# EAGLE board riffle-0.96-TwoHole-semi-route (EAGLE 7.3.0)
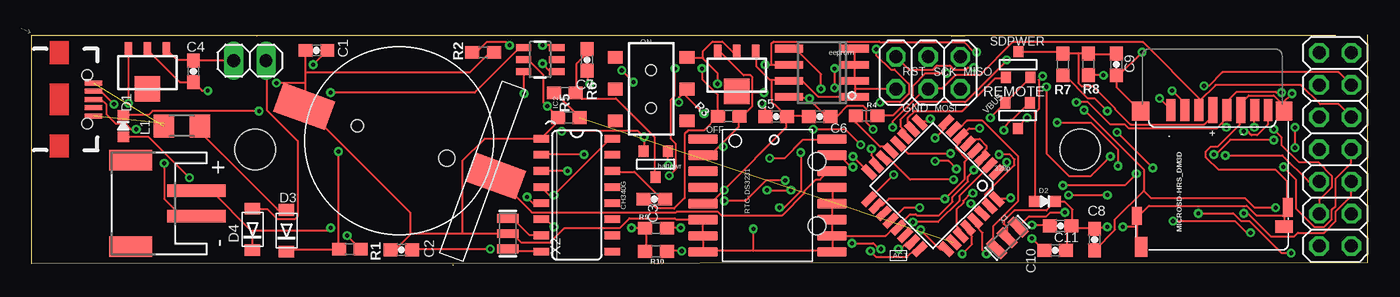
[diagram p0: board, top side]
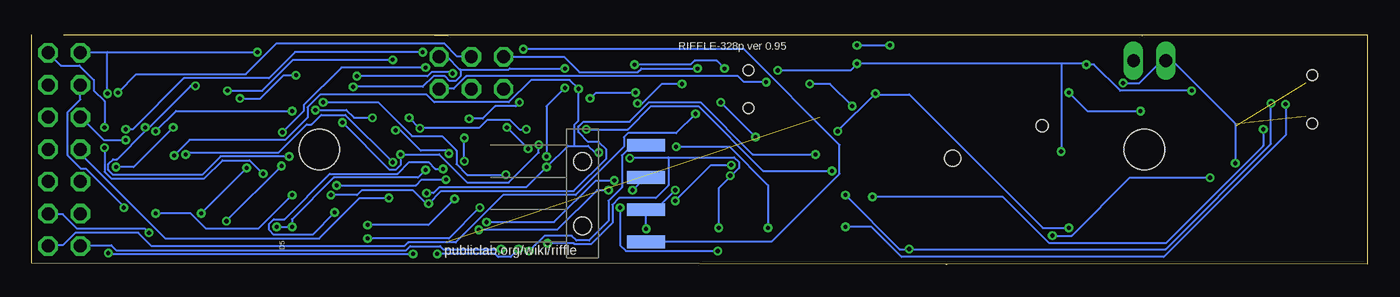
[diagram p1: board, bottom side, seen from below]

Size 105.25 x 18.15 mm. Coordinates in mm from the lower left corner, seen from the top.
Outline: 105.25,18.15 105.25,0.15 0,0.1 0,18.13 17.73,18.1
Outline: 17.73,18.1 102.72,18.11
Outline: 17.75,18.06 17.73,18.1
Outline: 23.37,18.11 23.42,18.11
Outline: 33.15,0 33.25,0
Outline: 72.47,18.06 74.59,18.1
Copper layers (1*16): Top 0.0356mm / dielectric 1.5011mm / Bottom 0.0356mm
Design rules "LaenPCBOrder": minimum track width 6mil, minimum drill 13mil, track to track 6mil, track to pad 6mil, pad to pad 6mil, via to via 6mil, smd to smd 6mil, copper to edge 15mil, drill to drill 6mil, minimum pad ring 7mil, minimum via ring 7mil, stop-mask expansion 3mil, vias tented up to drill 0mil, thermal gap 10mil
Holes 3.2 mm at 82.59,9.1 17.59,9.1

## Footprints (pad centres in the part's own frame; a part is rotated, then mirrored left to right if it is on the bottom)
BATTCON_12MM_SMT = smd 2.4 x 4.3: P$1 0,11.96 | smd 2.4 x 4.2: P$2 0,-4.1 | hole 0.95: 0,7.5 | hole 1.25: 0,0
SOT-23 = smd 0.787 x 0.889: 1 0.025,-1.016; 2 -0.94,1.016; 3 0.991,1.016
0603-CAP = smd 1.1 x 1: 1 -0.85,0; 2 0.85,0
JST-PH-2-SMT-RA = smd 1 x 4.6: 1 1,-3.7; 2 -1,-3.7 | smd 1.6 x 3.4: NC1 -3.4,1.5; NC2 3.4,1.5
0603-LED = smd 0.8 x 0.9: MINUS -0.85,0; PLUS 0.85,0
SOD-123FL = smd 0.91 x 1.22: A 1.637,0; C -1.637,0
TQFP32-08 = smd 1.27 x 0.559: 1 -4.293,2.8; 2 -4.293,2; 3 -4.293,1.2; 4 -4.293,0.4; 5 -4.293,-0.4; 6 -4.293,-1.2; 7 -4.293,-2; 8 -4.293,-2.8; 17 4.293,-2.8; 18 4.293,-2; 19 4.293,-1.2; 20 4.293,-0.4; 21 4.293,0.4; 22 4.293,1.2; 23 4.293,2; 24 4.293,2.8 | smd 0.559 x 1.27: 9 -2.8,-4.293; 10 -2,-4.293; 11 -1.2,-4.293; 12 -0.4,-4.293; 13 0.4,-4.293; 14 1.2,-4.293; 15 2,-4.293; 16 2.8,-4.293; 25 2.8,4.293; 26 2,4.293; 27 1.2,4.293; 28 0.4,4.293; 29 -0.4,4.293; 30 -1.2,4.293; 31 -2,4.293; 32 -2.8,4.293
SOT23-5 = smd 0.55 x 1.2: 1 -0.95,-1.3; 2 0,-1.3; 3 0.95,-1.3; 4 0.95,1.3; 5 -0.95,1.3; 6 0,1.3
SO16 = smd 0.6 x 1.2: 1 -4.445,-2.8; 2 -3.175,-2.8; 3 -1.905,-2.8; 4 -0.635,-2.8; 5 0.635,-2.8; 6 1.905,-2.8; 7 3.175,-2.8; 8 4.445,-2.8; 9 4.445,2.8; 10 3.175,2.8; 11 1.905,2.8; 12 0.635,2.8; 13 -0.635,2.8; 14 -1.905,2.8; 15 -3.175,2.8; 16 -4.445,2.8
SOT89 = smd 0.58 x 1.2: 1 -1.5,-1.8; 2 0,-1.8; 3 1.5,-1.8 | smd 2 x 2: 4 0,1.3
SO-08 = smd 0.6 x 2.2: 1 -1.905,-2.6; 2 -0.635,-2.6; 3 0.635,-2.6; 4 1.905,-2.6; 5 1.905,2.6; 6 0.635,2.6; 7 -0.635,2.6; 8 -1.905,2.6
2X03 = drill 1.016 octagon: 1 -2.54,-1.27; 2 -2.54,1.27; 3 0,-1.27; 4 0,1.27; 5 2.54,-1.27; 6 2.54,1.27
AYZ0202 = smd 1 x 1.15: 1 -2.5,2.825; 2 0,2.825; 3 2.5,2.825; 4 -2.5,-2.825; 5 0,-2.825; 6 2.5,-2.825 | hole 0.85: 1.5,0; -1.5,0
1X02 = drill 1.016 long: 1 -1.27,0; 2 1.27,0
1X04-SMD = smd 1 x 3: 1 -3.81,5; 2 -1.27,5; 3 1.27,5; 4 3.81,5 | hole 1.4: -2.54,0; 2.54,0
2X07 = drill 1.016 octagon: 1 -7.62,-1.27; 2 -7.62,1.27; 3 -5.08,-1.27; 4 -5.08,1.27; 5 -2.54,-1.27; 6 -2.54,1.27; 7 0,-1.27; 8 0,1.27; 9 2.54,-1.27; 10 2.54,1.27; 11 5.08,-1.27; 12 5.08,1.27; 13 7.62,-1.27; 14 7.62,1.27
R1206 = smd 1.6 x 1.803: 1 -1.422,0; 2 1.422,0
0603-NO = smd 1.1 x 1: 1 -0.85,0; 2 0.85,0
DS3231 = smd 0.762 x 2.286: 1 -4.445,-5.08; 2 -3.175,-5.08; 3 -1.905,-5.08; 4 -0.635,-5.08; 5 0.635,-5.08; 6 1.905,-5.08; 7 3.175,-5.08; 8 4.445,-5.08; 9 4.445,5.08; 10 3.175,5.08; 11 1.905,5.08; 12 0.635,5.08; 13 -0.635,5.08; 14 -1.905,5.08; 15 -3.175,5.08; 16 -4.445,5.08
DM3D = smd 0.7 x 1.75: CD/DAT3 8.15,0.45; CLK 4.85,0.45; CMD 7.05,0.45; DAT0 2.65,0.45; DAT1 1.6,0.45; DAT2 9.25,0.45 | smd 0.8 x 1.5: GND1 0.05,8.15 | smd 0.8 x 1.4: GND2 11.95,8.8 | smd 1.4 x 1.5: GND3 11.65,0.55 | smd 1.3 x 1.5: GND4 0.35,0.55 | smd 1 x 1.55: SW_A 11.6,11.25 | smd 1.4 x 1: SW_B 0.35,9.65 | smd 0.7 x 2.032: VDD 5.95,0.45; VSS 3.75,0.45
USB-AB-MICRO-SMD_V02_BOSS = smd 1.4 x 0.4: D+1 2.7,0; D-1 2.7,0.65; GND1 2.7,-1.3; ID1 2.7,-0.65; VBUS1 2.7,1.3 | hole 0.85: 2.2,1.9; 2.2,-1.9
RESONATOR-SMD = smd 0.7 x 1.7: 1 -1.2,0; 2 0,0; 3 1.2,0

## Placement (x,y rotation side)
BAT  CR1220  [BATTCON_12MM_SMT]  32.7,8.41 70 top
BATTPOWER  FDN340P  [SOT-23]  49.12,7.94 0 top
C1  10uF  [0603-CAP]  22.44,16.92 0 top
C2  0.1uF  [0603-CAP]  29.12,1.19 180 top
C3  0.1uF  [0603-CAP]  49.05,5.19 0 top
C4  10uF  [0603-CAP]  12.75,15.27 90 top
C5  10uF  [0603-CAP]  58.63,11.7 0 top
C6  10uF  [0603-CAP]  62.09,11.7 180 top
C7  0.1uF  [0603-CAP]  43.74,16.17 90 top
C8  0.1uF  [0603-CAP]  83.73,2 90 top
C9  0.1uF  [0603-CAP]  85.45,15.8 90 top
C10  0.1uF  [0603-CAP]  80.62,1.15 0 top
C11  0.1uF  [0603-CAP]  81.05,3.08 180 top
CN1  [JST-PH-2-SMT-RA]  9.29,4.85 90 top
D1  LED0603  [0603-LED]  7.22,10.96 270 top
D2  LED0603  [0603-LED]  79.81,5.01 180 top
D3  SCHOTTKY  [SOD-123FL]  20.07,2.7 90 top
D4  SCHOTTKY  [SOD-123FL]  17.39,2.8 90 top
IC1  ATMEGA328P  [TQFP32-08]  71,6.25 225 top
IC2  MCP73831  [SOT23-5]  40.05,16.2 270 top
IC3  CH340G  [SO16]  42.94,5.5 270 top
IC4  MCP1700-33  [SOT89]  55.53,14.98 180 top
IC5  24AA128SN  [SO-08]  62.26,15.15 90 top
IC6  MCP1700-33  [SOT89]  9.12,15.17 180 top
ISP  [2X03]  70.61,15.15 180 top
J1  AYZ0202  [AYZ0202]  48.8,13.87 270 top
JP1  [1X02]  17.18,16.11 0 top
JP3  [1X04-SMD]  61.85,5.63 270 bottom
JP5  [2X07]  102.69,9.11 270 top
L1  500mA  [R1206]  11.83,10.97 0 top
R1  10K  [0603-NO]  25.05,1.25 180 top
R2  4.7K  [0603-NO]  35.55,16.76 180 top
R3  10K  [0603-NO]  54.9,11.73 0 top
R4  10K  [0603-NO]  65.76,11.76 180 top
R5  10K  [0603-NO]  42.32,11.63 0 top
R6  10K  [0603-NO]  42.01,13.57 0 top
R7  50K  [0603-NO]  81.23,15.8 270 top
R8  50K  [0603-NO]  83.24,15.83 90 top
R9  10K  [0603-NO]  49.18,2.9 180 top
R10  10K  [0603-NO]  49.18,1.07 180 top
REMOTE  FDN340P  [SOT-23]  77.64,11.78 0 top
RTC-DS3231  DS3231  [DS3231]  57.96,5.48 270 top
SDPWER  FDN340P  [SOT-23]  77.73,15.8 180 top
U$1  MICROSD-HRS_DM3D  [DM3D]  99,12.67 180 top
U$4  [USB-AB-MICRO-SMD_V02_BOSS]  2.17,13.06 0 top
X2  12MHz  [RESONATOR-SMD]  37.52,2.47 270 top
X3  16 MHz  [RESONATOR-SMD]  76.85,2.14 45 top

## Library data of the parts
BAT IC2 IC3 J1 X2 = SparkFunNew
BATTPOWER REMOTE SDPWER = zetex; OC_FARNELL: unknown; OC_NEWARK: unknown
C1-C11 JP3 X3 = SparkFun
CN1 D3 D4 IC4 IC6 L1 = adafruit
D1 D2 = LowPowerLab
IC1 = atmel; MPN: ATMEGA8-16AU; OC_FARNELL: 9171371; OC_NEWARK: 73M8863
IC5 = microchip; MF: MICROCHIP; MPN: 24AA128-I/SN; OC_FARNELL: unknown; OC_NEWARK: 92C6842
ISP JP1 JP5 = pinhead
R1-R10 = microbuilder
RTC-DS3231 = _lh-library
U$1 = hrs_DM3D-SF
U$4 = Testing

## Nets
A0: IC1.23 JP5.13
A1: IC1.24 JP3.1
A2: IC1.25 JP3.2
A3: IC1.26 R5.2 R6.1
AREF: C10.1 IC1.20
D2: IC1.32 JP5.7
D3: IC1.1 JP5.5
D4: BATTPOWER.3 IC1.2
D5: IC1.9 JP3.4
D6: IC1.10 SDPWER.3
D7: IC1.11 U$1.CD/DAT3
D8: IC1.12 REMOTE.3
D9: IC1.13 R4.2
D10: IC1.14 JP5.2
D+: IC3.5 U$4.D+1
D-: IC3.6 U$4.D-1
GND: BAT.P$1 C1.1 C2.2 C4.2 C5.2 C6.2 C7.1 C8.2 C9.1 C10.2 C11.1 CN1.2 D2.MINUS IC1.3 IC1.5 IC1.21 IC2.2 IC3.1 IC4.1 IC5.1 IC5.2 IC5.3 IC5.4 IC5.7 IC6.1 ISP.6 JP1.1 JP3.3 JP5.1 R2.1 R5.1 RTC-DS3231.5 RTC-DS3231.6 RTC-DS3231.7 RTC-DS3231.8 RTC-DS3231.9 RTC-DS3231.10 RTC-DS3231.11 RTC-DS3231.12 RTC-DS3231.13 U$1.GND1 U$1.GND2 U$1.GND3 U$1.GND4 U$1.SW_A U$1.SW_B U$1.VSS U$4.GND1 X2.2 X3.2
MISO: IC1.16 ISP.1 JP5.4 U$1.DAT0
MOSI: IC1.15 ISP.4 JP5.6 U$1.CMD
N$1: D1.PLUS R1.1
N$2: IC1.7 X3.1
N$3: IC1.8 X3.3
N$4: C9.2 R7.1 R8.2 SDPWER.1 U$1.VDD
N$5: D1.MINUS IC2.1
N$6: IC2.5 R2.2
N$7: C8.1 JP5.3 REMOTE.1
N$8: C2.1 IC3.4 IC3.16 IC6.3
N$10: D3.A L1.2
N$11: IC3.7 X2.1
N$13: IC3.8 X2.3
N$14: D4.A JP1.2
N$15: BATTPOWER.1 C7.2 R6.2
N$16: R7.2 U$1.DAT1
N$17: D2.PLUS R4.1
N$18: R8.1 U$1.DAT2
N$19: L1.1 U$4.VBUS1
RESET: C3.1 IC1.29 ISP.5 R3.1
RST: C3.2 IC3.14
RTC_BATT: BAT.P$2 RTC-DS3231.14
RXD: IC1.30 IC3.2 JP5.10
SCK: IC1.17 ISP.3 JP5.8 U$1.CLK
SCL: IC1.28 IC5.6 JP5.11 R9.1 RTC-DS3231.16
SDA: IC1.27 IC5.5 JP5.9 R10.1 RTC-DS3231.15
TXD: IC1.31 IC3.3 JP5.12
VBAT [vcc]: BATTPOWER.2 CN1.1 D4.C IC2.3 J1.2 JP5.14
VBUS [vcc]: C1.2 C4.1 D3.C IC2.4 IC6.2 ISP.2 R1.2
VCC: C6.1 C11.2 IC1.4 IC1.6 IC1.18 IC4.3 IC5.8 R3.2 R9.2 R10.2 REMOTE.2 RTC-DS3231.2 SDPWER.2
VDD: C5.1 IC4.2 J1.1

## Tracks (layer width: path | path; a pad name or v marks a point on that pad's centre or on a via)
A0  (via drill 0.33)
  Top 0.152: v68.27,1.24 68.43,1.24 68.96,1.78 69.34,1.78 IC1.23
  Bottom 0.152: v68.27,1.24 72.85,1.24 73.08,1.47 75.44,1.47 75.74,1.17 98.6,1.17 98.98,1.55 101.35,1.55 JP5.13
A1  (via drill 0.33)
  Top 0.152: v66.07,1.09 66.52,0.63 68.96,0.63 69.49,1.17 69.88,1.17 IC1.24
  Bottom 0.152: v66.07,1.09 64.85,2.31 62.71,2.31 62.33,1.93 61.34,1.93 59.82,3.45 59.82,5.05 58.75,6.12 58.75,8.64 57.99,9.4 56.92,9.4 JP3.1
A2  (via drill 0.33)
  Top 0.152: v70.03,2.77 71.55,1.24 72.01,1.24 IC1.25 | v57.91,5.89 v59.82,5.89
  Bottom 0.152: v70.03,2.77 63.86,2.77 60.73,5.89 v59.82,5.89 | v57.91,5.89 56.92,6.88 JP3.2
A3  (1 unrouted)
  Top 0.152: R5.2 43.13,11.68 41.22,13.59 R6.1
AREF  (via drill 0.33)
  Top 0.152: v78.79,2.08 79.7,1.17 C10.1 | v69.95,4.52 68.73,4.52 67.74,3.53 IC1.20
  Bottom 0.152: v78.79,2.08 72.39,2.08 v69.95,4.52
D2  (via drill 0.33)
  Top 0.152: v77.11,5.28 77.04,5.21 76.05,5.21 IC1.32
  Bottom 0.152: v77.11,5.28 79.4,5.28 82.6,2.08 94.72,2.08 101.35,8.71 101.35,9.09 JP5.7
D3  (via drill 0.33)
  Top 0.152: v76.81,8.1 76.05,7.34 IC1.1 | v93.12,8.71 93.27,8.71 94.41,9.86 v97.84,9.86
  Bottom 0.152: v76.81,8.1 80.54,11.84 82.45,11.84 83.21,11.07 83.59,11.07 85.8,8.86 92.96,8.86 v93.12,8.71 | v97.84,9.86 99.59,9.86 101.35,11.61 JP5.5
D4  (via drill 0.33)
  Top 0.152: v50.14,7.87 50.14,8.94 BATTPOWER.3 | v54.56,5.05 56.24,5.05 57.84,6.65 v59.36,6.65 | v69.42,3.38 71.4,3.38 73.08,5.05 73.08,5.44 75.44,7.8 IC1.2
  Bottom 0.152: v50.14,7.87 51.74,7.87 v54.56,5.05 | v59.36,6.65 60.81,6.65 64.08,3.38 v69.42,3.38
D5  (via drill 0.33)
  Top 0.152: v70.79,11.53 70.56,11.3 69.95,11.3 IC1.9 | v66.83,12.83 68.43,12.83 69.11,13.51 69.11,14.27 67.97,15.42 67.67,15.42 66.52,16.56 v66.52,17.02
  Bottom 0.152: v70.79,11.53 69.72,11.53 68.73,12.52 67.13,12.52 v66.83,12.83 | v66.52,17.02 49.15,17.02 41.6,9.47 41.6,7.19 46.94,1.85 56.84,1.85 JP3.4
D6
  Top 0.152: SDPWER.3 76.73,14.73 75.89,14.73 73.3,12.14 69.57,12.14 69.04,11.61 69.04,11.07 69.34,10.77 IC1.10
D7  (via drill 0.33)
  Top 0.152: IC1.11 68.81,10.54 68.43,10.92 68.43,11.46 69.8,12.83 73.53,12.83 76.81,16.1 v76.81,16.18 | v89.84,13.74 90.83,12.75 90.83,12.29 U$1.CD/DAT3
  Bottom 0.152: v76.81,16.18 84.66,16.18 87.1,13.74 v89.84,13.74
D8  (via drill 0.33)
  Top 0.152: v76.58,10.62 76.58,10.85 77.19,11.46 77.27,11.46 78.56,12.75 REMOTE.3 | v72.39,8.79 69.04,8.79 68.27,9.55 IC1.12
  Bottom 0.152: v76.58,10.62 76.2,10.62 74.6,9.02 72.62,9.02 v72.39,8.79
D9
  Top 0.152: R4.2 64.92,11.76 64.92,11.23 66.83,9.32 67.36,9.32 67.67,9.02 IC1.13
D10  (via drill 0.33)
  Top 0.152: v72.62,6.73 69.19,6.73 67.51,8.41 67.13,8.41 IC1.14 | v81.23,6.27 86.11,6.27 v87.02,7.19 | v99.52,10.85 v99.52,9.25
  Bottom 0.152: v72.62,6.73 74.52,6.73 74.98,6.27 v81.23,6.27 | v87.02,7.19 88.09,8.25 90.22,8.25 91.67,6.81 98.98,6.81 99.52,7.34 v99.52,9.25 | v99.52,10.85 99.52,12.9 100.36,13.74 100.36,14.58 101.5,15.72 102.95,15.72 103.94,16.71 JP5.2
D+  (via drill 0.33)
  Top 0.152: v39.01,5.36 39.47,4.9 40.08,4.9 IC3.5 | v8.23,10.69 7.85,10.69 7.39,11.15 6.63,11.15 5.87,11.91 5.87,12.67 5.49,13.06 U$4.D+1
  Bottom 0.152: v39.01,5.36 28.73,5.36 25.07,1.7 15.93,1.7 8.23,9.4 v8.23,10.69
D-  (via drill 0.33)
  Top 0.152: v41.15,3 40.61,3.53 40.16,3.53 IC3.6 | v6.48,12.67 5.49,13.67 4.88,13.67 U$4.D-1
  Bottom 0.152: v41.15,3 39.09,3 36.73,0.63 16.08,0.63 6.48,10.24 v6.48,12.67
GND  (via drill 0.33)  (1 unrouted)
  Top 0.152: U$1.GND3 87.32,12.14 85.5,13.97 85.5,14.88 C9.1 85.57,14.88 v87.48,16.79 | C11.1 81.91,3.15 81.99,3.23 81.99,4.37 81.38,4.98 80.7,4.98 D2.MINUS 80.62,4.98 79.93,4.29 77.42,4.29 76.58,3.45 76.58,3.23 76.81,3 76.81,2.16 X3.2 | C10.2 81.53,1.17 81.53,2.77 81.84,3.07 C11.1 | C11.1 81.99,3.15 82.22,2.92 83.67,2.92 C8.2 83.74,2.92 84.66,2.92 v84.73,3 | 98.68,3.91 98.68,4.29 98.91,4.52 U$1.GND1 | 98.68,3.91 98.68,3.07 U$1.SW_B | 87.1,3 87.1,1.7 87.32,1.47 U$1.SW_A | 87.1,3 87.1,3.84 U$1.GND2 87.17,3.84 88.01,4.67 95.71,4.67 96.47,3.91 98.68,3.91 | 98.68,3.91 U$1.GND1 | U$1.GND1 98.91,4.6 98.91,6.58 97.99,7.49 93.5,7.49 92.51,8.48 92.51,8.94 92.89,9.32 93.42,9.32 95.17,11.07 95.17,12.22 U$1.VSS 95.25,12.29 95.25,12.75 95.86,13.36 97.84,13.36 98.6,12.6 98.6,12.14 U$1.GND4 98.53,12.75 v99.29,13.51 | 87.1,3 v85.95,3 | 64.85,17.09 IC5.4 64.85,17.02 64.85,15.8 IC5.3 64.85,15.72 64.85,14.58 IC5.2 64.85,14.5 64.85,13.89 | 64.85,13.89 64.85,13.28 IC5.1 64.77,13.28 61.95,13.28 60.73,14.5 IC5.7 59.59,14.58 58.29,14.58 | 64.85,13.89 68.05,13.89 ISP.6 | C5.2 59.51,11.76 61.19,11.76 C6.2 | 58.29,14.58 58.14,14.58 57.07,15.65 57.07,16.71 IC4.1 | 58.29,14.58 58.29,12.83 58.45,12.67 58.52,12.67 59.44,11.76 C5.2 | 54.52,5.93 59.44,10.85 59.44,11.68 C5.2 | 54.52,5.93 53.49,4.9 52.88,4.9 RTC-DS3231.5 | v54.56,5.89 54.52,5.93 | RTC-DS3231.13 63.09,6.05 63.09,4.9 RTC-DS3231.12 63.09,4.83 63.09,3.61 RTC-DS3231.11 63.09,3.53 63.09,2.39 RTC-DS3231.10 | IC1.5 73.76,9.63 74.07,9.93 74.68,9.93 75.21,9.4 75.21,9.17 74.9,8.86 74.9,8.48 IC1.3 74.83,8.41 74.83,8.03 74.26,7.45 | 68.27,3 IC1.21
  Top 0.152: IC1.21 68.2,2.92 67.89,2.92 67.28,2.31 63.09,2.31 RTC-DS3231.10 | 74.26,7.45 73.76,6.96 73.76,6.58 72.54,5.36 72.54,4.98 71.48,3.91 69.72,3.91 69.65,3.99 69.19,3.99 68.27,3.07 IC1.21 | RTC-DS3231.10 63.09,2.24 63.09,1.09 RTC-DS3231.9 63.02,1.09 56.84,1.09 | 56.84,1.09 52.96,1.09 RTC-DS3231.8 52.88,1.09 52.88,2.24 RTC-DS3231.7 52.88,3.53 RTC-DS3231.6 52.81,3.61 50.75,3.61 50.67,3.68 47.09,3.68 46.33,2.92 41.99,2.92 40.84,1.78 38.56,1.78 37.87,2.46 37.57,2.46 X2.2 37.49,2.46 33.91,2.46 | 56.84,1.09 v56.84,2.84 | 29.83,2.43 29.87,2.46 33.91,2.46 | 29.83,2.43 28.65,1.24 28.35,1.24 C2.2 | IC3.1 40.16,10.01 41.45,11.3 41.45,11.61 R5.1 41.45,11.68 v40.61,12.52 40.31,12.83 40.31,14.96 39.09,16.18 38.79,16.18 IC2.2 | v43.97,14.27 43.81,14.43 43.81,15.27 C7.1 | 40.16,9.93 IC3.1 | 33.91,2.46 33.91,8.18 35.66,9.93 40.08,9.93 IC3.1 | IC6.1 10.67,16.94 11.43,16.18 12.73,16.18 C4.2 12.8,16.1 15.85,16.1 JP1.1 | 21.56,14.35 21.56,12.6 21.49,12.52 BAT.P$1 21.49,12.45 29.79,4.14 29.79,2.46 29.83,2.43 | 21.56,14.35 21.56,15.19 | 21.56,15.19 21.56,16.87 C1.1 | 21.56,15.19 34.52,15.19 36.04,16.71 36.35,16.71 R2.1 | 21.56,14.35 v19.28,14.35 | v10.44,8.03 10.44,5.21 11.73,3.91 12.95,3.91 CN1.2 | v74.22,7.49 74.26,7.45
  Bottom 0.152: 99.29,16.79 101.35,16.79 JP5.1 | 99.29,16.79 v87.48,16.79 | v85.95,3 v84.73,3 84.73,3.61 81.46,6.88 74.83,6.88 v74.22,7.49 | v99.29,13.51 99.29,16.79 | v54.56,5.89 56.08,4.37 JP3.3 56.84,4.29 v56.84,2.84 | v43.97,14.27 42.37,14.27 v40.61,12.52 | v19.28,14.35 17.98,14.35 16.23,16.1 15.93,16.1 JP1.1 15.85,16.1 15.39,16.1 10.44,11.15 v10.44,8.03
MISO  (via drill 0.33)
  Top 0.152: v96.32,10.85 96.32,12.22 U$1.DAT0 | v92.35,14.12 92.74,14.12 93.8,15.19 102.95,15.19 103.94,14.2 JP5.4 | v64.69,8.56 65.91,7.34 IC1.16 | v63.25,15.49 v63.25,13.97 | v84.96,8.56 83.44,7.04 81.69,7.04 79.93,8.79 v79.93,14.05
  Bottom 0.152: v92.35,14.12 92.74,14.12 96.01,10.85 v96.32,10.85 96.32,10.54 98.53,8.33 98.83,8.33 99.21,7.95 99.21,7.49 98.83,7.11 91.82,7.11 90.37,8.56 v84.96,8.56 | v64.69,8.56 64.69,12.52 v63.25,13.97 | v63.25,15.49 67.59,15.49 67.67,15.42 71.48,15.42 | 71.48,15.42 71.55,15.42 72.54,16.41 73.15,16.41 ISP.1 | v79.93,14.05 74.45,14.05 73.61,14.88 72.69,14.88 72.31,14.5 71.86,14.5 71.48,14.88 71.48,15.42
MOSI  (via drill 0.33)
  Top 0.152: v66.14,9.17 66.14,8.64 66.52,8.25 66.52,7.87 IC1.15 | v67.82,10.85 67.82,11.3 70.33,13.82 70.56,13.82 ISP.4 70.64,13.89 71.7,13.89 72.77,14.96 74.68,14.96 77.27,17.55 87.55,17.55 92.05,13.06 U$1.CMD 91.97,12.29 91.97,12.9 93.27,14.2 99.97,14.2 101.5,12.67 102.95,12.67 103.94,11.68 JP5.6
  Bottom 0.152: v67.82,10.85 v66.14,9.17
N$1  (via drill 0.33)
  Top 0.152: v12.42,6.88 9.22,10.08 7.24,10.08 D1.PLUS | v24.84,2.31 25.83,1.32 R1.1
  Bottom 0.152: v12.42,6.88 18.74,6.88 23.32,2.31 v24.84,2.31
N$2
  Top 0.152: IC1.7 72.62,10.77 73.08,10.77 73.69,11.38 74.9,11.38 77.72,8.56 77.72,5.05 75.74,3.07 75.74,1.55 75.97,1.32 X3.1
N$3  (via drill 0.33)
  Top 0.152: v71.17,10.01 72.01,10.85 72.01,11.23 IC1.8 | v71.17,8.18 72.24,8.18 v72.85,7.57 | v81.38,4.14 80.24,4.14 79.93,3.84 78.56,3.84 77.72,3 X3.3
  Bottom 0.152: v71.17,8.18 v71.17,10.01 | v72.85,7.57 73.46,7.57 73.99,8.1 75.51,8.1 76.43,7.19 81.76,7.19 85.34,3.61 86.18,3.61 86.56,3.23 86.56,2.77 86.18,2.39 83.13,2.39 v81.38,4.14
N$4
  Top 0.152: SDPWER.1 77.72,16.79 81.08,16.79 81.15,16.71 R7.1 81.23,16.71 82.45,16.71 | 82.45,16.71 83.21,16.71 R8.2 83.29,16.64 85.42,16.64 C9.2 | 82.45,16.71 82.45,14.35 82.68,14.12 83.59,14.12 85.34,12.37 85.34,12.29 86.56,11.07 92.35,11.07 93.04,11.76 93.04,12.22 U$1.VDD
N$5  (via drill 0.33)
  Top 0.152: v17.91,12.14 9.52,12.14 9.22,11.84 7.24,11.84 D1.MINUS | v23.55,13.59 34.9,13.59 38.4,17.09 38.71,17.09 IC2.1
  Bottom 0.152: v17.91,12.14 22.1,12.14 v23.55,13.59
N$6  (via drill 0.33)
  Top 0.152: v37.64,17.32 37.41,17.55 35.81,17.55 35.05,16.79 34.75,16.79 R2.2 | v40.23,17.32 41.15,17.32 41.3,17.17 IC2.5
  Bottom 0.152: v40.23,17.32 v37.64,17.32
N$7  (via drill 0.33)
  Top 0.152: v78.41,11.61 77.72,10.92 77.72,10.77 REMOTE.1 | v82.91,12.22 87.63,7.49 87.63,5.89 87.59,5.85 | 87.59,5.85 85.34,3.61 85.34,2.77 83.74,1.17 C8.1 | v97.99,4.52 96.32,4.52 95.55,5.28 88.16,5.28 87.59,5.85
  Bottom 0.152: v78.41,11.61 79.86,11.61 80.47,12.22 v82.91,12.22 | v97.99,4.52 97.99,4.6 100.96,7.57 101.35,7.57 102.41,8.64 102.41,12.06 101.42,13.06 101.42,14.12 JP5.3
N$8  (via drill 0.33)
  Top 0.152: v36.12,1.24 30.02,1.24 C2.1 | IC3.4 40.16,6.12 40.77,5.51 v41.15,5.51 45.57,9.93 45.72,9.93 IC3.16 | v7.62,12.75 7.62,16.94 IC6.3
  Bottom 0.152: v41.15,5.51 36.88,1.24 v36.12,1.24 15.93,1.24 7.62,9.55 v7.62,12.75
N$10
  Top 0.152: D3.A 20.04,4.37 19.35,4.37 13.26,10.46 13.26,10.92 L1.2
N$11
  Top 0.152: IC3.7 40.08,2.39 39.17,2.39 37.95,3.61 37.57,3.61 X2.1
N$13
  Top 0.152: IC3.8 40.08,1.09 37.72,1.09 37.57,1.24 X2.3
N$14
  Top 0.152: D4.A 17.45,4.37 18.59,4.37 19.35,3.61 20.73,3.61 20.95,3.84 20.95,9.78 18.52,12.22 18.52,16.1 JP1.2
N$15
  Top 0.152: BATTPOWER.1 49.07,6.96 49.07,10.08 46.02,13.13 43.28,13.13 42.9,13.51 R6.2 42.9,13.59 42.9,15.87 43.74,16.71 C7.2
N$16  (via drill 0.33)
  Top 0.152: v84.73,12.14 83.74,13.13 83.21,13.13 81.46,14.88 81.23,14.88 R7.2 | v95.48,10.54 95.78,10.54 96.09,10.24 96.55,10.24 97.38,11.07 97.38,12.22 U$1.DAT1
  Bottom 0.152: v84.73,12.14 93.88,12.14 v95.48,10.54
N$17  (via drill 0.33)
  Top 0.152: v79.63,14.88 79.32,14.58 79.32,12.29 79.02,11.99 79.02,5.05 D2.PLUS | v72.08,15.11 70.41,15.11 69.42,14.12 69.42,13.36 67.89,11.84 66.67,11.84 R4.1
  Bottom 0.152: v79.63,14.88 74.07,14.88 73.76,15.19 72.16,15.19 v72.08,15.11
N$18  (via drill 0.33)
  Top 0.152: v84.43,14.96 83.29,14.96 R8.1 | v88.85,13.13 89.69,12.29 U$1.DAT2
  Bottom 0.152: v84.43,14.96 85.42,14.96 87.25,13.13 v88.85,13.13
N$19  (1 unrouted)
RESET  (via drill 0.33)
  Top 0.152: C3.1 48.23,5.13 48.54,5.13 49.22,4.44 50.6,4.44 51.43,5.28 51.43,10.31 51.74,10.62 52.96,10.62 54.03,11.68 R3.1 54.03,11.76 54.03,13.44 52.81,14.66 v52.81,15.49 | v75.21,0.86 74.9,1.17 74.9,2.54 74.37,3.07 74.37,3.45 IC1.29 | v99.21,0.94 98.45,0.94 95.94,3.45 95.25,3.45 94.64,4.06 v91.9,4.06 | v85.5,10.46 v88.32,7.65 | v74.22,15.57 73.76,15.57 73.61,15.42 72.62,15.42 72.31,15.72 71.32,15.72 71.02,15.42 69.11,15.42 68.12,16.41 ISP.5
  Bottom 0.152: v75.21,0.86 99.14,0.86 v99.21,0.94 | v88.32,7.65 v91.9,4.06 | v85.5,10.46 83.82,12.14 83.82,12.6 80.85,15.57 v74.22,15.57 | v52.81,15.49 57.23,15.49 57.53,15.19 62.1,15.19 63.32,16.41 68.05,16.41 ISP.5
RST
  Top 0.152: C3.2 49.83,5.21 49.61,5.21 47.47,7.34 45.8,7.34 IC3.14
RTC_BATT
  Top 0.152: RTC-DS3231.14 63.02,7.34 62.71,7.34 62.1,6.73 61.8,6.73 60.88,5.82 60.88,5.66 59.13,3.91 54.33,3.91 54.03,4.22 50.83,4.22 50.75,4.14 39.4,4.14 36.58,6.96 BAT.P$2
RXD  (via drill 0.33)
  Top 0.152: v43.51,8.71 40.16,8.71 IC3.2 | v73.99,4.83 74.83,3.99 IC1.30 | v95.48,4.06 95.78,4.06 97.61,2.24 99.44,2.24 99.75,2.54 101.8,2.54 102.72,3.45 102.72,4.22 103.94,5.44 103.94,6.5 JP5.10 | v81.69,5.51 v84.73,5.51
  Bottom 0.152: v43.51,8.71 48.46,8.71 52.58,12.83 56.62,12.83 58.14,11.3 61.8,11.3 62.18,10.92 62.18,10.46 61.42,9.7 60.58,9.7 59.97,9.09 59.97,8.41 62.56,5.82 73,5.82 v73.99,4.83 73.99,4.9 74.22,4.9 75.21,5.89 79.25,5.89 79.63,5.51 v81.69,5.51 | v95.48,4.06 92.74,4.06 91.52,2.84 87.4,2.84 v84.73,5.51
SCK  (via drill 0.33)
  Top 0.152: v67.89,7.11 65.99,5.21 IC1.17 | v82.3,12.83 83.21,12.83 84.96,11.07 86.11,11.07 86.41,10.77 93.34,10.77 93.76,11.19 | 93.76,11.19 94.11,11.53 94.11,12.22 U$1.CLK 94.18,12.29 94.18,12.9 94.94,13.67 97.99,13.67 98.07,13.59 v98.45,13.59 | v98.6,7.72 99.59,6.73 99.59,4.44 101.04,3 101.8,3 102.41,3.61 102.41,4.37 102.72,4.67 102.72,6.81 103.94,8.03 103.94,9.09 JP5.8 | 93.76,11.19 v94.11,10.85
  Bottom 0.152: v67.89,7.11 70.94,7.11 71.78,7.95 71.78,9.02 72.92,10.16 75.29,10.16 77.95,12.83 v82.3,12.83 | v98.6,7.72 97.23,7.72 v94.11,10.85 | v98.45,13.59 97,15.04 88.39,15.04 85.95,17.48 72.77,17.48 71.78,16.48 70.64,16.48 ISP.3
SCL  (via drill 0.33)
  Top 0.152: v51.13,2.92 50.06,2.92 R9.1 | v58.14,8.41 59.28,8.41 60.73,9.86 63.02,9.86 RTC-DS3231.16 | v73.3,0.86 74.07,1.63 74.07,2.24 73.76,2.54 73.76,2.92 IC1.28 | v66.9,1.24 66.75,1.24 66.29,1.7 v64.62,1.7 | v57.76,15.8 58.29,15.8 | 58.29,15.8 59.59,15.8 IC5.6 | v50.67,15.49 50.67,13.36 50.37,13.06 50.37,9.93 50.75,9.55 50.75,7.57 v50.22,7.04 | v97.84,10.69 98.45,10.08 98.45,9.47 99.82,8.1 101.35,8.1 102.41,7.04 102.41,6.12 101.42,5.13 101.42,4.06 JP5.11 | v74.45,16.79 74.22,16.79 73.46,17.55 66.83,17.55 66.75,17.63 58.45,17.63 58.29,17.48 58.29,15.8
  Bottom 0.152: v51.13,2.92 51.13,6.05 50.18,7 | 50.18,7 49.53,7.65 49.53,8.1 49.91,8.48 55.09,8.48 | 55.09,8.48 58.06,8.48 v58.14,8.41 | v73.3,0.86 68.73,0.86 68.5,0.63 67.51,0.63 v66.9,1.24 | v64.62,1.7 62.56,1.7 62.48,1.63 61.19,1.63 59.51,3.3 59.51,4.75 58.98,5.28 56.08,5.28 55.09,6.27 55.09,8.48 | v57.76,15.8 53.34,15.8 53.03,16.1 51.28,16.1 v50.67,15.49 | v50.22,7.04 50.18,7 | v97.84,10.69 97.31,10.69 93.27,14.73 86.56,14.73 84.51,16.79 v74.45,16.79
SDA  (via drill 0.33)
  Top 0.152: v51.21,1.09 50.06,1.09 R10.1 | v58.9,4.52 59.28,4.52 60.58,5.82 v60.58,8.86 | v64.69,7.72 64.54,7.72 63.63,8.64 63.09,8.64 RTC-DS3231.15 | v74.14,5.66 73.99,5.66 73.38,5.05 73.38,4.9 72.85,4.37 72.85,3.07 73.15,2.77 73.15,2.39 IC1.27 | v62.18,13.89 62.18,15.04 60.2,17.02 59.66,17.02 IC5.5 | v94.03,8.64 98.53,8.64 100.58,6.58 101.35,6.58 JP5.9
  Bottom 0.152: v51.21,1.09 58.45,1.09 58.9,1.55 v58.9,4.52 | v60.58,8.86 60.88,8.86 61.42,9.4 62.48,9.4 | 62.48,9.4 63.02,9.4 v64.69,7.72 66.29,6.12 73.15,6.12 73.61,5.66 v74.14,5.66 | 62.48,9.4 62.48,11.07 62.18,11.38 v62.18,13.89 62.86,14.58 65.91,14.58 67.67,12.83 73.53,12.83 74.14,13.44 82.52,13.44 83.51,12.45 83.51,11.61 85.27,9.86 92.81,9.86 v94.03,8.64
TXD  (via drill 0.33)
  Top 0.152: v42.21,7.42 40.16,7.42 IC3.3 | v61.57,10.69 64.08,10.69 v65.3,9.47 | v76.2,8.71 77.04,8.71 77.42,8.33 77.42,7.87 75.13,5.59 75.13,4.98 75.44,4.67 IC1.31 | v96.01,2.54 95.71,2.54 94.79,3.45 v89.92,3.45 | v85.57,7.8 85.57,9.09 83.44,11.23 v80.77,11.23
  Bottom 0.152: v42.21,7.42 47.62,7.42 52.73,12.52 56.46,12.52 58.29,10.69 v61.57,10.69 | v65.3,9.47 65.3,8.86 67.67,6.5 70.94,6.5 73.15,8.71 v76.2,8.71 76.2,7.87 76.58,7.49 77.04,7.49 v80.77,11.23 | v96.01,2.54 96.32,2.84 101.65,2.84 102.79,3.99 103.94,3.99 JP5.12 | v85.57,7.8 v89.92,3.45
VBAT  (via drill 0.33)
  Top 0.152: 17.34,2.65 14.17,5.82 13.03,5.82 CN1.1 | 17.34,2.65 17.37,2.62 17.37,1.17 D4.C | v50.98,12.83 50.98,13.21 51.59,13.82 J1.2 51.36,13.51 v52.96,11.91 | BATTPOWER.2 48.23,9.02 v48.23,10.08 47.78,10.54 v41.76,10.54 | v38.79,13.51 38.79,15.19 IC2.3 | v23.55,2.92 23.32,2.69 17.37,2.69 17.34,2.65
  Bottom 0.152: v50.98,12.83 v48.23,10.08 | v41.76,10.54 v38.79,13.51 38.79,13.44 36.12,13.44 25.6,2.92 v23.55,2.92 | v52.96,11.91 54.48,10.39 58.29,10.39 58.6,10.08 58.6,9.32 62.41,5.51 68.12,5.51 71.86,1.78 75.59,1.78 75.89,1.47 95.78,1.47 96.85,2.54 101.8,2.54 102.79,1.55 103.94,1.55 JP5.14
VBUS  (via drill 0.33)
  Top 0.152: D3.C 20.12,1.09 20.27,1.24 24.16,1.24 R1.2 24.16,1.32 v24.16,8.94 | IC6.2 9.14,16.94 11.66,14.43 12.73,14.43 C4.1 12.8,14.35 13.41,13.74 v13.87,13.74 | v22.17,15.8 23.24,16.87 C1.2 | v40.23,15.87 40.84,15.27 41.3,15.27 IC2.4 | v46.48,15.34 v47.4,14.43
  Bottom 0.152: v13.87,13.74 19.51,13.74 21.56,15.8 v22.17,15.8 22.25,15.87 24.16,15.87 | 24.16,15.87 v40.23,15.87 40.77,15.34 v46.48,15.34 | 24.16,15.87 v24.16,8.94 | v47.4,14.43 49.15,14.43 49.61,14.88 71.02,14.88 72.01,13.89 73.15,13.89 ISP.2
VCC  (via drill 0.33)
  Top 0.152: R10.2 48.39,1.09 48.39,2.84 R9.2 48.31,2.92 v47.24,2.92 | 54.29,9.51 53.49,8.71 52.88,8.71 RTC-DS3231.2 | 54.29,9.51 55.7,10.92 55.7,11.68 R3.2 55.78,11.76 56.01,11.76 56.77,12.52 56.77,13.59 | 56.77,13.59 56.77,14.81 56.62,14.96 56.08,14.96 54.33,16.71 54.1,16.71 IC4.3 | 54.29,9.51 v54.48,9.32 | 61.23,13.09 61.11,13.21 59.66,13.21 IC5.8 59.66,13.28 | 61.23,13.09 62.56,11.76 62.86,11.76 C6.1 62.94,11.76 63.47,11.76 64.24,12.52 65.53,12.52 65.76,12.29 65.76,11.23 v66.29,10.69 | SDPWER.2 78.64,14.73 76.73,12.83 REMOTE.2 76.66,12.75 v75.51,11.61 | v78.79,3.15 80.16,3.15 C11.2 | 73.69,8.33 74.29,8.94 IC1.4 | 73.69,8.33 73.46,8.1 73.46,6.73 v71.93,5.21 67.51,5.21 66.98,4.67 66.6,4.67 IC1.18 | 73.69,8.33 72.85,9.17 72.85,9.4 73.15,9.7 73.15,10.08 IC1.6 73.23,10.16 73.84,10.77 v74.68,10.77 | v57.68,13.59 56.77,13.59 | v61.26,13.13 61.23,13.09
  Bottom 0.152: v47.24,2.92 47.24,6.27 50.29,9.32 v54.48,9.32 | v78.79,3.15 73.99,3.15 v71.93,5.21 | v75.51,11.61 v74.68,10.77 74.68,10.85 69.95,10.85 69.34,11.46 67.59,11.46 66.83,10.69 v66.29,10.69 | v57.68,13.59 60.81,13.59 v61.26,13.13
VDD  (via drill 0.33)
  Top 0.152: v57.53,12.75 57.76,12.52 57.76,11.76 C5.1 | v54.03,14.27 54.03,15.11 52.84,16.29 | 52.84,16.29 52.81,16.33 51.66,16.33 J1.1 | IC4.2 55.47,16.79 55.24,16.79 54.41,17.63 53.64,17.63 52.88,16.87 52.88,16.33 52.84,16.29
  Bottom 0.152: v57.53,12.75 57.15,12.75 55.63,14.27 v54.03,14.27

## Text on the board
tPlace: ON | eeprom | RST | SCK | MISO | IC2 | GND | MOSI | VBUS | OFF | 328p | battpwr | CH340G | X2 | ACT
bPlace: RIFFLE-328p ver 0.95 | D5 | publiclab.org/wiki/riffle
Document: all dimensions in mm